# Altium PCB pulseox-clamp-PCB.PcbDoc
Units mm, origin at the board's own origin, x right, y up, seen from the top; angles counter-clockwise.
Board outline 10 x 8 mm, 2 copper layers (Top Layer, Bottom Layer); 2 components, 3 nets, 9 pads, 0 vias.
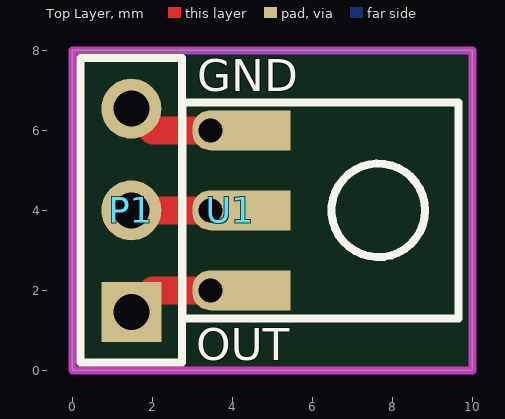
[diagram p0: Top Layer view]
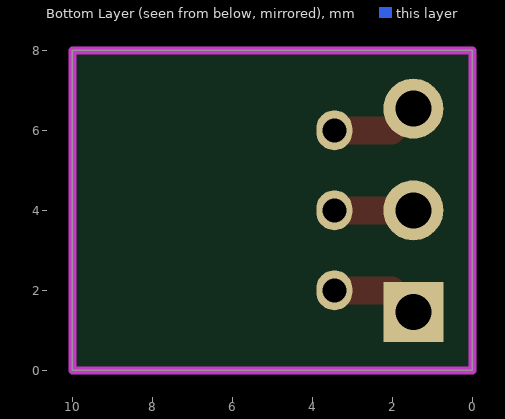
[diagram p1: Bottom Layer view, seen from below]

## Layer stack, top to bottom
Top Solder: solder mask 0.0102, Solder Resist, Dk 3.5
Top Layer: signal copper 0.0356
Dielectric 1: dielectric 0.32, FR-4, Dk 4.8
Bottom Layer: signal copper 0.0356
Bottom Solder: solder mask 0.0102, Solder Resist, Dk 3.5

## Board outline
0,0 10,0 10,8 0,8

## Design rules (kind name [scope] priority, off if disabled: settings)
Clearance [All] p1: gap=0.254 ignorepadtopadclearanceinfootprint=FALSE except(0: Arc-Hole Track-Hole SMDPad-Hole THPad-Hole Via-Hole Fill-Hole Poly-Hole Region-Hole Text-Hole)
PolygonConnect [All] p1: connectstyle=Relief reliefconductorwidth=0.254 reliefentries=4 polygonreliefangle="90 Angle" airgapwidth=0.254
RoutingVias [All] p1: holewidth=0.711 width=1.27 viastyle="Through Hole" minholewidth=0.711 minwidth=1.27 maxholewidth=0.711 maxwidth=1.27
SilkToSilkClearance [All] p1: silktosilkclearance=0
SilkToSolderMaskClearance [IsPad] p1: minsilkscreentomaskgap=0 clearancetoexposedcopper=TRUE
SolderMaskExpansion [All] p1: expansion=0.102
Width [All] p1: maxlimit=2 minlimit=0.254 preferedwidth=0.254 minimp=50.000000 maximp=50.000000 favimp=50.000000
28 further rules are at their usual default settings.

## Components (designator, comment, footprint, x,y, rotation, side; value= is the part's Value field where it differs from the comment)
P1 "Header 3" HDR1X3 1.475,1.46 r90 top
U1 "TSL252R-LF" LIGHT_RCV1 3.45,6 r270 top

## Footprints (in the part's own frame and the unit in brackets; to place one, negate y for a bottom-side part, rotate by r counter-clockwise, add the part's x,y. Pads: shape width x height; smd on the part's side, far side on the other; paste and mask are expansions set on the pad)
HDR1X3 [mm] "Connector; Header; 3 Position"
  rect 1.5x1.5 hole 0.9: 1(0,0)
  round 1.5 hole 0.9: 2(2.54,0) 3(5.08,0)
  silkscreen extent -1.27,-1.27 6.35,1.27
LIGHT_RCV1 [mm]
  rect 1x2 smd paste+0 mask+0: 1(0,1) 2(2,1) 3(4,1)
  oval 1x0.9 hole 0.6 paste+0 mask+0: 1(0,0) 2(2,0) 3(4,0)
  silkscreen extent -0.7,-0.7 4.7,6.2

## Part data
P1: "Header, 3-Pin", LatestRevisionDate=17-Jul-2002, LatestRevisionNote="Re-released for DXP Platform.", Publisher="Altium Limited"
U1: "AMS   TSL252R-LF   PHOTODIODE, SENSOR, L/VOLTS", Case/Package=S, Manufacturer="ams TAOS", Max Operating Temperature=70°C, Max Supply Voltage=5.5V, Min Operating Temperature=0°C, Min Supply Voltage=2.7V, Output Current=10mA, Package Quantity=500, Supplier Part Number 1=856-TSL252R-LF, ComponentLink1Description=https://datasheet.ciiva.com/25650/tsl252r-lf-25650398.pdf, ComponentLink1URL=https://datasheet.ciiva.com/25650/tsl252r-lf-25650398.pdf, ComponentLink2Description=https://datasheet.ciiva.com/45465/tsl251r-datasheet-en-v1-45465110.pdf, ComponentLink2URL=https://datasheet.ciiva.com/45465/tsl251r-datasheet-en-v1-45465110.pdf, ComponentLink3Description=https://datasheet.ciiva.com/1316/301932-1316311.pdf, ComponentLink3URL=https://datasheet.ciiva.com/1316/301932-1316311.pdf, Lead Free="Lead Free", Lead Length=14.8mm, Manufacturer Part Number=TSL252R-LF, Number of Pins=3, Output Type=Voltage, Packaging=Bulk, Pricing 1="1=2.83, 10=2.56, 50=1.96, 100=1.83, 1000=1.24, 10000=1.24 (USD)", REACH SVHC="No SVHC", Stock 1=1918, Supplier 1=Mouser, Wavelength=635nm

## Nets (pads, with @x,y where several pads share a name; then routed paths per layer and width w, separated by ;. In a path a pad name is that pad's centre, name@x,y a point inside that pad or via, vN(x,y) a via of type N, cw(c..) or ccw(c..) an arc to the next point about the centre after c; other vN are vias at no path point)
GND: P1.3 U1.1 | length 2.2
  Top Layer w0.7: P1.3 2.015,6 U1.1@3.45,6
OUT: P1.1 U1.3 | length 2.2
  Top Layer w0.7: P1.1 2.015,2 U1.3@3.45,2
VCC: P1.2 U1.2 | length 2
  Top Layer w0.7: P1.2 U1.2@3.45,4

## Keep-outs
Keep-Out Layer:
  the board outline again, w0.2

## Silkscreen, mask and mechanical layers (free items; w line width, h text height)
Top Overlay:
  text "GND" at 3.125,6.975 h0.8
  text "OUT" at 3.1,0.25 h0.8

## Dimensions
1.475,4 to 0,0 on Mechanical 1
0,8 to 10,8 on Mechanical 1
0,0 to 0,8 on Mechanical 1